# Altium PCB XEM7310_Berakout.PcbDoc (part 2 of 3)
Units mil, origin at the board's own origin, x right, y up, seen from the top; angles counter-clockwise.
Board outline 5980 x 6510 mil, 4 copper layers (Top, Ground Plane, Power Plane, Bottom), stack 61.496 mil thick; 68 components, 204 nets, 832 pads, 382 vias.
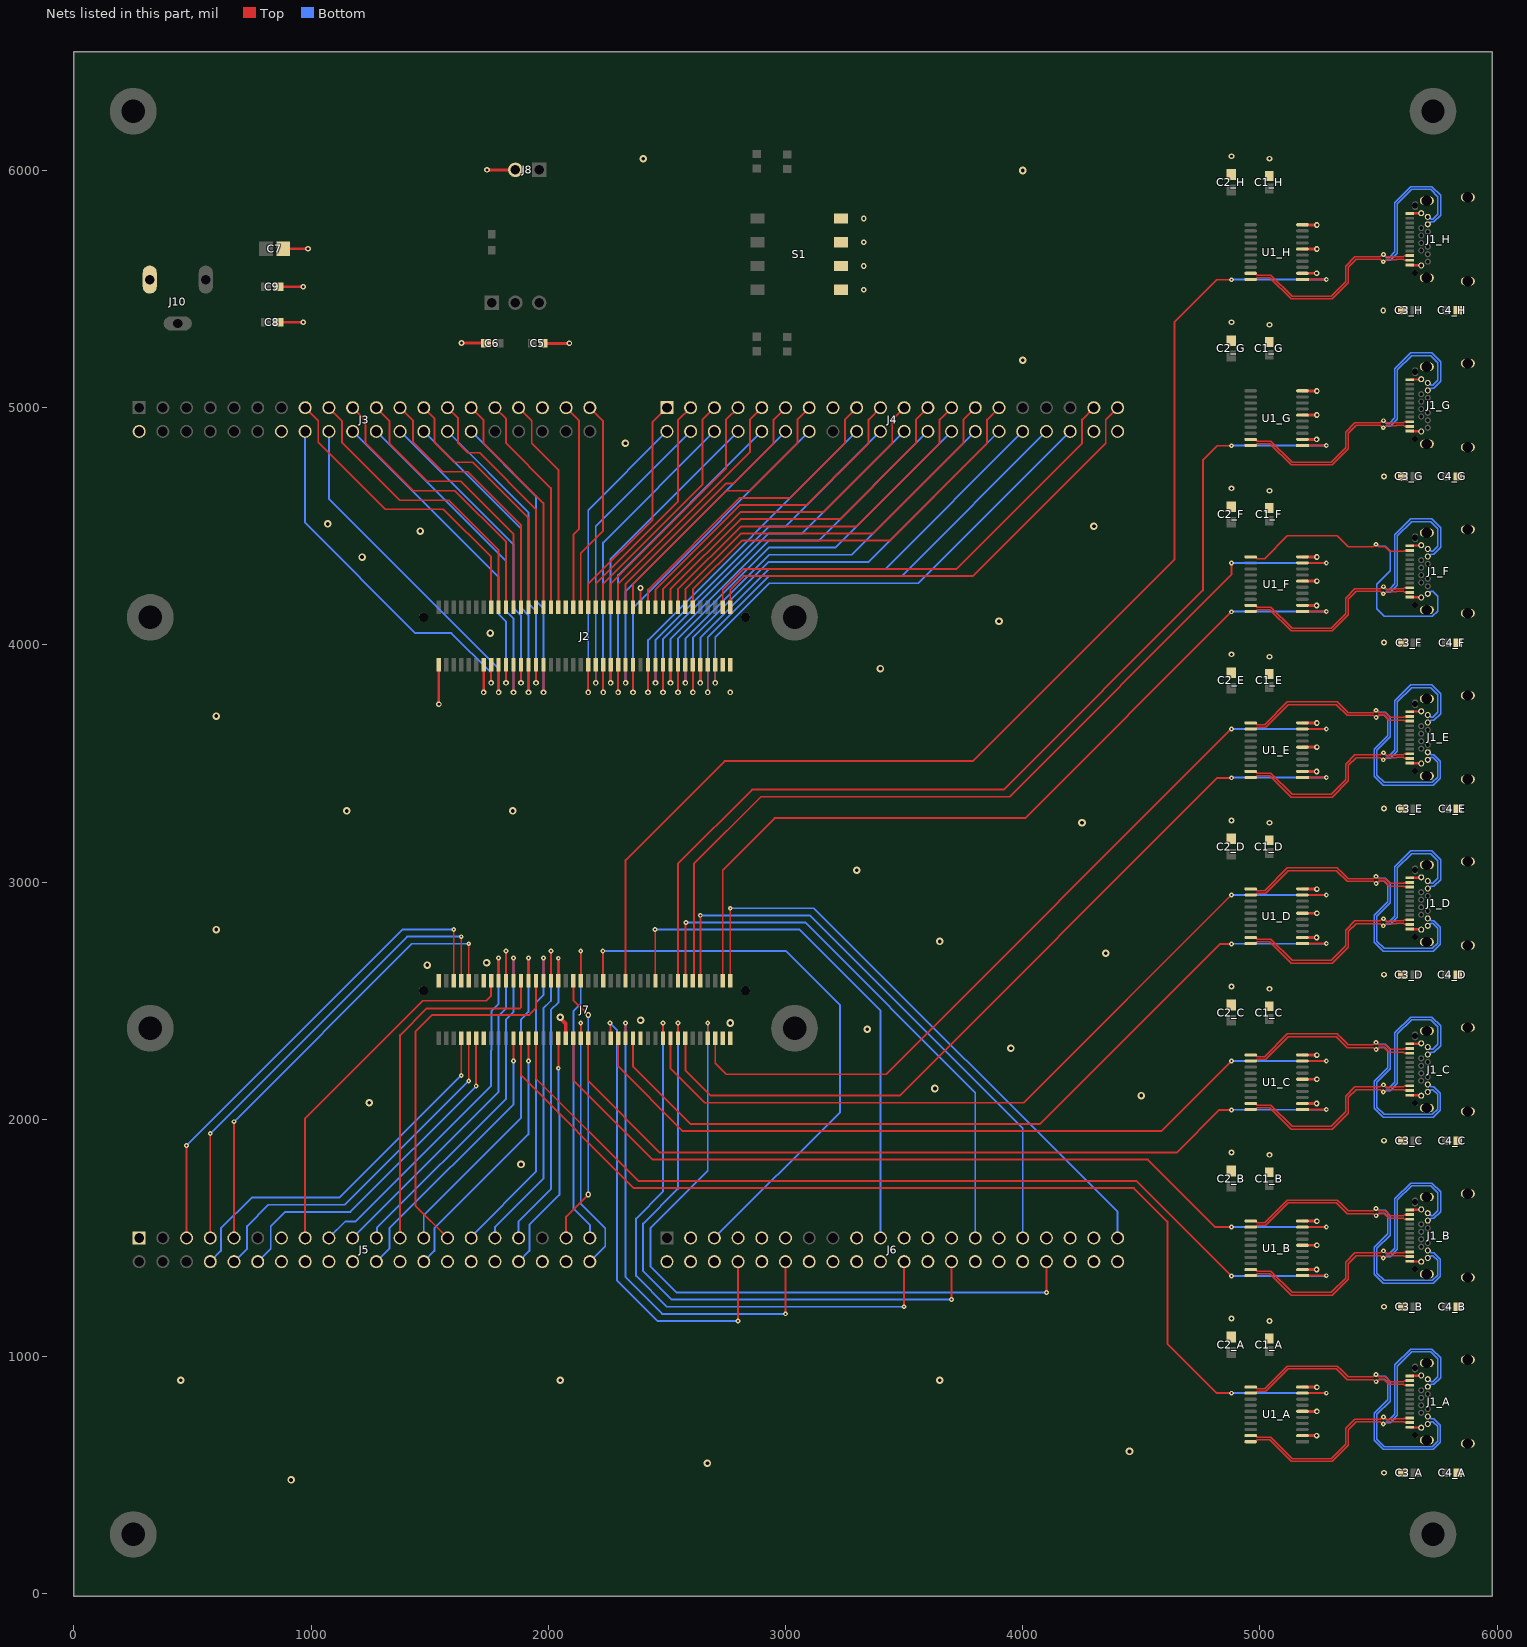
[diagram p4: the nets of this part, all layers, seen from the top]

## Via types
v1: diameter 20, hole 8, Top to Bottom, 190 vias
v2: diameter 24, hole 12, Top to Bottom, 154 vias
v3: diameter 32, hole 16, Top to Bottom, 38 vias

## Nets (pads, with @x,y where several pads share a name; then routed paths per layer and width w, separated by ;. In a path a pad name is that pad's centre, name@x,y a point inside that pad or via, vN(x,y) a via of type N, cw(c..) or ccw(c..) an arc to the next point about the centre after c; other vN are vias at no path point) (continued)
C\S\_A_N: J1_A.A3 J1_A.B3 U1_A.19 | length 1489
  Top w6.3: U1_A.19@4960.73,666.55 4982.63,666.55 4989.78,659.4 5046.58,659.4 5135.98,570 5300.05,570 5361.07,631.02 5361.07,696.82 5400.82,736.57 5508.31,736.57 5517.25,745.5 5522.75,745.5 5532.71,735.55 5570.36,735.55 5571.72,736.91 5605.67,736.91 5609.24,740.47 5631.77,740.47 J1_A.A3@5632.4,741.1
  Bottom w6.3: v1(5520.82,745.5) 5522.84,745.5 5535.59,732.75 5544.64,732.75 5568.7,756.81 5568.7,964.68 5635.32,1031.3 5724.68,1031.3 5761.3,994.68 5761.3,910.74 5733.65,883.09 5722.89,883.09 5712.8,872.99 J1_A.B3@5707.6,872.99
C\S\_A_P: J1_A.A2 J1_A.B2 U1_A.20 | length 1449.3
  Top w6.3: U1_A.20@4960.73,640.96 4982.63,640.96 4989.78,648.1 5041.9,648.1 5131.3,558.7 5304.73,558.7 5372.37,626.34 5372.37,692.14 5405.5,725.26 5508.31,725.26 5518.07,715.51 5523.57,715.51 5532.31,724.24 5575.04,724.24 5576.41,725.61 5605.67,725.61 5609.24,722.05 5631.77,722.05 J1_A.A2@5632.4,721.42
  Bottom w6.3: v1(5520,715.51) 5523.71,715.51 5529.65,721.45 5549.32,721.45 5580,752.13 5580,960 5640,1020 5720,1020 5750,990 5750,915.42 5728.97,894.39 5722.89,894.39 5712.8,904.49 J1_A.B2@5707.6,904.49
C\S\_B: J7.28 U1_B.1 | length 3947.2
  Top w8: J7.28@1947.91,2341.02 1947.91,2172.09 2380,1740 4479.51,1740 v1(4880,1339.51) ; U1_B.1@5179.27,1340.96 v1(5280,1340.96)
  Bottom w8: v1(4880,1339.51) 4880.73,1340.23 5279.27,1340.23 v1(5280,1340.96)
C\S\_B_N: J1_B.A3 J1_B.B3 U1_B.19 | length 1489
  Top w6.3: U1_B.19@4960.73,1366.55 4982.63,1366.55 4989.78,1359.4 5046.58,1359.4 5135.98,1270 5300.05,1270 5361.07,1331.02 5361.07,1396.82 5400.82,1436.57 5508.31,1436.57 5517.25,1445.5 5522.75,1445.5 5532.71,1435.55 5570.36,1435.55 5571.72,1436.91 5605.67,1436.91 5609.24,1440.47 5631.77,1440.47 J1_B.A3@5632.4,1441.1
  Bottom w6.3: v1(5520.82,1445.5) 5522.84,1445.5 5535.59,1432.75 5544.64,1432.75 5568.7,1456.81 5568.7,1664.68 5635.32,1731.3 5724.68,1731.3 5761.3,1694.68 5761.3,1610.74 5733.65,1583.09 5722.89,1583.09 5712.8,1572.99 J1_B.B3@5707.6,1572.99
C\S\_B_P: J1_B.A2 J1_B.B2 U1_B.20 | length 1449.3
  Top w6.3: U1_B.20@4960.73,1340.96 4982.63,1340.96 4989.78,1348.1 5041.9,1348.1 5131.3,1258.7 5304.73,1258.7 5372.37,1326.34 5372.37,1392.14 5405.5,1425.26 5508.31,1425.26 5518.07,1415.51 5523.57,1415.51 5532.31,1424.24 5575.04,1424.24 5576.41,1425.61 5605.67,1425.61 5609.24,1422.05 5631.77,1422.05 J1_B.A2@5632.4,1421.42
  Bottom w6.3: v1(5520,1415.51) 5523.71,1415.51 5529.65,1421.45 5549.32,1421.45 5580,1452.13 5580,1660 5640,1720 5720,1720 5750,1690 5750,1615.42 5728.97,1594.39 5722.89,1594.39 5712.8,1604.49 J1_B.B2@5707.6,1604.49
C\S\_C: J7.42 U1_C.1 | length 3591.6
  Top w8: J7.42@2168.39,2341.02 2168.39,2161.61 2470,1860 4649.54,1860 4829.05,2039.51 v1(4880,2039.51) ; U1_C.1@5179.27,2040.96 v1(5280,2040.96)
  Bottom w8: v1(4880,2039.51) 4880.73,2040.23 5279.27,2040.23 v1(5280,2040.96)
C\S\_C_N: J1_C.A3 J1_C.B3 U1_C.19 | length 1489
  Top w6.3: U1_C.19@4960.73,2066.55 4982.63,2066.55 4989.78,2059.4 5046.58,2059.4 5135.98,1970 5300.05,1970 5361.07,2031.02 5361.07,2096.82 5400.82,2136.57 5508.31,2136.57 5517.25,2145.5 5522.75,2145.5 5532.71,2135.55 5570.36,2135.55 5571.72,2136.91 5605.67,2136.91 5609.24,2140.47 5631.77,2140.47 J1_C.A3@5632.4,2141.1
  Bottom w6.3: v1(5520.82,2145.5) 5522.84,2145.5 5535.59,2132.75 5544.64,2132.75 5568.7,2156.81 5568.7,2364.68 5635.32,2431.3 5724.68,2431.3 5761.3,2394.68 5761.3,2310.74 5733.65,2283.09 5722.89,2283.09 5712.8,2272.99 J1_C.B3@5707.6,2272.99
C\S\_C_P: J1_C.A2 J1_C.B2 U1_C.20 | length 1449.3
  Top w6.3: U1_C.20@4960.73,2040.96 4982.63,2040.96 4989.78,2048.1 5041.9,2048.1 5131.3,1958.7 5304.73,1958.7 5372.37,2026.34 5372.37,2092.14 5405.5,2125.26 5508.31,2125.26 5518.07,2115.51 5523.57,2115.51 5532.31,2124.24 5575.04,2124.24 5576.41,2125.61 5605.67,2125.61 5609.24,2122.05 5631.77,2122.05 J1_C.A2@5632.4,2121.42
  Bottom w6.3: v1(5520,2115.51) 5523.71,2115.51 5529.65,2121.45 5549.32,2121.45 5580,2152.13 5580,2360 5640,2420 5720,2420 5750,2390 5750,2315.42 5728.97,2294.39 5722.89,2294.39 5712.8,2304.49 J1_C.B2@5707.6,2304.49
C\S\_D: J7.54 U1_D.1 | length 3557.5
  Top w8: J7.54@2357.36,2341.02 2357.36,2222.64 2600,1980 4072.6,1980 4832.1,2739.51 v1(4880,2739.51) ; U1_D.1@5179.27,2740.96 v1(5280,2740.96)
  Bottom w8: v1(4880,2739.51) 4880.73,2740.23 5279.27,2740.23 v1(5280,2740.96)
C\S\_D_N: J1_D.A3 J1_D.B3 U1_D.19 | length 1489
  Top w6.3: U1_D.19@4960.73,2766.55 4982.63,2766.55 4989.78,2759.4 5046.58,2759.4 5135.98,2670 5300.05,2670 5361.07,2731.02 5361.07,2796.82 5400.82,2836.57 5508.31,2836.57 5517.25,2845.5 5522.75,2845.5 5532.71,2835.55 5570.36,2835.55 5571.72,2836.91 5605.67,2836.91 5609.24,2840.47 5631.77,2840.47 J1_D.A3@5632.4,2841.1
  Bottom w6.3: v1(5520.82,2845.5) 5522.84,2845.5 5535.59,2832.75 5544.64,2832.75 5568.7,2856.81 5568.7,3064.68 5635.32,3131.3 5724.68,3131.3 5761.3,3094.68 5761.3,3010.74 5733.65,2983.09 5722.89,2983.09 5712.8,2972.99 J1_D.B3@5707.6,2972.99
C\S\_D_P: J1_D.A2 J1_D.B2 U1_D.20 | length 1449.3
  Top w6.3: U1_D.20@4960.73,2740.96 4982.63,2740.96 4989.78,2748.1 5041.9,2748.1 5131.3,2658.7 5304.73,2658.7 5372.37,2726.34 5372.37,2792.14 5405.5,2825.26 5508.31,2825.26 5518.07,2815.51 5523.57,2815.51 5532.31,2824.24 5575.04,2824.24 5576.41,2825.61 5605.67,2825.61 5609.24,2822.05 5631.77,2822.05 J1_D.A2@5632.4,2821.42
  Bottom w6.3: v1(5520,2815.51) 5523.71,2815.51 5529.65,2821.45 5549.32,2821.45 5580,2852.13 5580,3060 5640,3120 5720,3120 5750,3090 5750,3015.42 5728.97,2994.39 5722.89,2994.39 5712.8,3004.49 J1_D.B2@5707.6,3004.49
C\S\_E: J7.68 U1_E.1 | length 3536.5
  Top w8: J7.68@2577.83,2341.02 2577.83,2207.32 2685.16,2100 3480.61,2100 4820.12,3439.51 v1(4880,3439.51) ; U1_E.1@5179.27,3440.96 v1(5280,3440.96)
  Bottom w8: v1(4880,3439.51) 4880.73,3440.23 5279.27,3440.23 v1(5280,3440.96)
C\S\_E_N: J1_E.A3 J1_E.B3 U1_E.19 | length 1489
  Top w6.3: U1_E.19@4960.73,3466.55 4982.63,3466.55 4989.78,3459.4 5046.58,3459.4 5135.98,3370 5300.05,3370 5361.07,3431.02 5361.07,3496.82 5400.82,3536.57 5508.31,3536.57 5517.25,3545.5 5522.75,3545.5 5532.71,3535.55 5570.36,3535.55 5571.72,3536.91 5605.67,3536.91 5609.24,3540.47 5631.77,3540.47 J1_E.A3@5632.4,3541.1
  Bottom w6.3: v1(5520.82,3545.5) 5522.84,3545.5 5535.59,3532.75 5544.64,3532.75 5568.7,3556.81 5568.7,3764.68 5635.32,3831.3 5724.68,3831.3 5761.3,3794.68 5761.3,3710.74 5733.65,3683.09 5722.89,3683.09 5712.8,3672.99 J1_E.B3@5707.6,3672.99
C\S\_E_P: J1_E.A2 J1_E.B2 U1_E.20 | length 1449.3
  Top w6.3: U1_E.20@4960.73,3440.96 4982.63,3440.96 4989.78,3448.1 5041.9,3448.1 5131.3,3358.7 5304.73,3358.7 5372.37,3426.34 5372.37,3492.14 5405.5,3525.26 5508.31,3525.26 5518.07,3515.51 5523.57,3515.51 5532.31,3524.24 5575.04,3524.24 5576.41,3525.61 5605.67,3525.61 5609.24,3522.05 5631.77,3522.05 J1_E.A2@5632.4,3521.42
  Bottom w6.3: v1(5520,3515.51) 5523.71,3515.51 5529.65,3521.45 5549.32,3521.45 5580,3552.13 5580,3760 5640,3820 5720,3820 5750,3790 5750,3715.42 5728.97,3694.39 5722.89,3694.39 5712.8,3704.49 J1_E.B2@5707.6,3704.49
C\S\_F: J7.77 U1_F.1 | length 3563.9
  Top w8: J7.77@2735.32,2584.02 2735.32,3050.98 2954.33,3270 4010.49,3270 v1(4880,4139.51) ; U1_F.1@5179.27,4140.96 v1(5280,4140.96)
  Bottom w8: v1(4880,4139.51) 4880.73,4140.23 5279.27,4140.23 v1(5280,4140.96)
C\S\_F_N: J1_F.A3 J1_F.B3 U1_F.19 | length 1489
  Top w6.3: U1_F.19@4960.73,4166.55 4982.63,4166.55 4989.78,4159.4 5046.58,4159.4 5135.98,4070 5300.05,4070 5361.07,4131.02 5361.07,4196.82 5400.82,4236.57 5508.31,4236.57 5517.25,4245.5 5522.75,4245.5 5532.71,4235.55 5570.36,4235.55 5571.72,4236.91 5605.67,4236.91 5609.24,4240.47 5631.77,4240.47 J1_F.A3@5632.4,4241.1
  Bottom w6.3: v1(5520.82,4245.5) 5522.84,4245.5 5535.59,4232.75 5544.64,4232.75 5568.7,4256.81 5568.7,4464.68 5635.32,4531.3 5724.68,4531.3 5761.3,4494.68 5761.3,4410.74 5733.65,4383.09 5722.89,4383.09 5712.8,4372.99 J1_F.B3@5707.6,4372.99
C\S\_F_P: J1_F.A2 J1_F.B2 U1_F.20 | length 1449.3
  Top w6.3: U1_F.20@4960.73,4140.96 4982.63,4140.96 4989.78,4148.1 5041.9,4148.1 5131.3,4058.7 5304.73,4058.7 5372.37,4126.34 5372.37,4192.14 5405.5,4225.26 5508.31,4225.26 5518.07,4215.51 5523.57,4215.51 5532.31,4224.24 5575.04,4224.24 5576.41,4225.61 5605.67,4225.61 5609.24,4222.05 5631.77,4222.05 J1_F.A2@5632.4,4221.42
  Bottom w6.3: v1(5520,4215.51) 5523.71,4215.51 5529.65,4221.45 5549.32,4221.45 5580,4252.13 5580,4460 5640,4520 5720,4520 5750,4490 5750,4415.42 5728.97,4394.39 5722.89,4394.39 5712.8,4404.49 J1_F.B2@5707.6,4404.49
C\S\_G: J7.65 U1_G.1 | length 4379.3
  Top w8: J7.65@2546.34,2584.02 2546.34,3076.8 2859.54,3390 3920,3390 4760,4230 4760,4778.7 4820.81,4839.51 v1(4880,4839.51) ; U1_G.1@5179.27,4840.96 v1(5280,4840.96)
  Bottom w8: v1(4880,4839.51) 4880.73,4840.23 5279.27,4840.23 v1(5280,4840.96)
C\S\_G_N: J1_G.A3 J1_G.B3 U1_G.19 | length 1489
  Top w6.3: U1_G.19@4960.73,4866.55 4982.63,4866.55 4989.78,4859.4 5046.58,4859.4 5135.98,4770 5300.05,4770 5361.07,4831.02 5361.07,4896.82 5400.82,4936.57 5508.31,4936.57 5517.25,4945.5 5522.75,4945.5 5532.71,4935.55 5570.36,4935.55 5571.72,4936.91 5605.67,4936.91 5609.24,4940.47 5631.77,4940.47 J1_G.A3@5632.4,4941.1
  Bottom w6.3: v1(5520.82,4945.5) 5522.84,4945.5 5535.59,4932.75 5544.64,4932.75 5568.7,4956.81 5568.7,5164.68 5635.32,5231.3 5724.68,5231.3 5761.3,5194.68 5761.3,5110.74 5733.65,5083.09 5722.89,5083.09 5712.8,5072.99 J1_G.B3@5707.6,5072.99
C\S\_G_P: J1_G.A2 J1_G.B2 U1_G.20 | length 1449.3
  Top w6.3: U1_G.20@4960.73,4840.96 4982.63,4840.96 4989.78,4848.1 5041.9,4848.1 5131.3,4758.7 5304.73,4758.7 5372.37,4826.34 5372.37,4892.14 5405.5,4925.26 5508.31,4925.26 5518.07,4915.51 5523.57,4915.51 5532.31,4924.24 5575.04,4924.24 5576.41,4925.61 5605.67,4925.61 5609.24,4922.05 5631.77,4922.05 J1_G.A2@5632.4,4921.42
  Bottom w6.3: v1(5520,4915.51) 5523.71,4915.51 5529.65,4921.45 5549.32,4921.45 5580,4952.13 5580,5160 5640,5220 5720,5220 5750,5190 5750,5115.42 5728.97,5094.39 5722.89,5094.39 5712.8,5104.49 J1_G.B2@5707.6,5104.49
C\S\_H: J7.51 U1_H.1 | length 5164.1
  Top w8: J7.51@2325.87,2584.02 2325.87,3092.76 2743.11,3510 3789.58,3510 4640,4360.42 4640,5361.54 4817.97,5539.51 v1(4880,5539.51) ; U1_H.1@5179.27,5540.96 v1(5280,5540.96)
  Bottom w8: v1(4880,5539.51) 4880.73,5540.23 5279.27,5540.23 v1(5280,5540.96)
C\S\_H_N: J1_H.A3 J1_H.B3 U1_H.19 | length 1489
  Top w6.3: U1_H.19@4960.73,5566.55 4982.63,5566.55 4989.78,5559.4 5046.58,5559.4 5135.98,5470 5300.05,5470 5361.07,5531.02 5361.07,5596.82 5400.82,5636.57 5508.31,5636.57 5517.25,5645.5 5522.75,5645.5 5532.71,5635.55 5570.36,5635.55 5571.72,5636.91 5605.67,5636.91 5609.24,5640.47 5631.77,5640.47 J1_H.A3@5632.4,5641.1
  Bottom w6.3: v1(5520.82,5645.5) 5522.84,5645.5 5535.59,5632.75 5544.64,5632.75 5568.7,5656.81 5568.7,5864.68 5635.32,5931.3 5724.68,5931.3 5761.3,5894.68 5761.3,5810.74 5733.65,5783.09 5722.89,5783.09 5712.8,5772.99 J1_H.B3@5707.6,5772.99
C\S\_H_P: J1_H.A2 J1_H.B2 U1_H.20 | length 1449.3
  Top w6.3: U1_H.20@4960.73,5540.96 4982.63,5540.96 4989.78,5548.1 5041.9,5548.1 5131.3,5458.7 5304.73,5458.7 5372.37,5526.34 5372.37,5592.14 5405.5,5625.26 5508.31,5625.26 5518.07,5615.51 5523.57,5615.51 5532.31,5624.24 5575.04,5624.24 5576.41,5625.61 5605.67,5625.61 5609.24,5622.05 5631.77,5622.05 J1_H.A2@5632.4,5621.42
  Bottom w6.3: v1(5520,5615.51) 5523.71,5615.51 5529.65,5621.45 5549.32,5621.45 5580,5652.13 5580,5860 5640,5920 5720,5920 5750,5890 5750,5815.42 5728.97,5794.39 5722.89,5794.39 5712.8,5804.49 J1_H.B2@5707.6,5804.49
FPGA_TCK: J5.05 J7.05 | length 2109.4
  Top w8: J5.05@475,1500 v1(475,1890) ; J7.05@1601.46,2584.02 v1(1601.46,2800)
  Bottom w8: v1(475,1890) 1385,2800 v1(1601.46,2800)
FPGA_TDI: J5.09 J7.09 | length 1946.1
  Top w8: J5.09@675,1500 v1(675,1990) ; J7.09@1664.45,2584.02 v1(1664.45,2740)
  Bottom w8: v1(675,1990) 1425,2740 v1(1664.45,2740)
FPGA_TDO: J5.08 J7.08 | length 1594.7
  Top w8: v1(1632.95,2185.08) J7.08@1632.95,2341.02
  Bottom w8: J5.08@575,1400 620,1445 620,1540 750,1670 1117.87,1670 v1(1632.95,2185.08)
FPGA_TMS: J5.07 J7.07 | length 2027.7
  Top w8: J5.07@575,1500 v1(575,1940) ; J7.07@1632.95,2584.02 v1(1632.95,2770)
  Bottom w8: v1(575,1940) 1405,2770 v1(1632.95,2770)
GND: C1_A.2 C1_B.2 C1_C.2 C1_D.2 C1_E.2 C1_F.2 C1_G.2 C1_H.2 C2_A.1 C2_B.1 C2_C.1 C2_D.1 C2_E.1 C2_F.1 C2_G.1 C2_H.1 C3_A.2 C3_B.2 C3_C.2 C3_D.2 C3_E.2 C3_F.2 C3_G.2 C3_H.2 C4_A.2 C4_B.2 C4_C.2 C4_D.2 C4_E.2 C4_F.2 C4_G.2 C4_H.2 C5.2 C6.2 C7.2 C8.2 C9.2 J1_A.1 J1_A.2 J1_A.3 J1_A.4 J1_A.A1 J1_A.A12 J1_A.B1 J1_A.B12 J1_B.1 J1_B.2 J1_B.3 J1_B.4 J1_B.A1 J1_B.A12 J1_B.B1 J1_B.B12 J1_C.1 J1_C.2 J1_C.3 J1_C.4 J1_C.A1 J1_C.A12 J1_C.B1 J1_C.B12 J1_D.1 J1_D.2 J1_D.3 J1_D.4 J1_D.A1 J1_D.A12 J1_D.B1 J1_D.B12 J1_E.1 J1_E.2 J1_E.3 J1_E.4 J1_E.A1 J1_E.A12 J1_E.B1 J1_E.B12 J1_F.1 J1_F.2 J1_F.3 J1_F.4 J1_F.A1 J1_F.A12 J1_F.B1 J1_F.B12 J1_G.1 J1_G.2 J1_G.3 J1_G.4 J1_G.A1 J1_G.A12 J1_G.B1 J1_G.B12 J1_H.1 J1_H.2 J1_H.3 J1_H.4 J1_H.A1 J1_H.A12 J1_H.B1 J1_H.B12 J2.02 J2.14 J2.35 J2.55 J2.78 J2.80 J3.02 J3.14 J3.35 J4.15 J4.38 J4.40 J5.01 J5.13 J5.14 J5.16 J5.18 J5.20 J5.24 J5.28 J5.30 J5.32 J5.36 J5.38 J6.02 J6.03 J6.04 J6.06 J6.07 J6.09 J6.10 J6.11 J6.14 J6.16 J6.17 J6.18 J6.20 J6.21 J6.23 J6.24 J6.25 J6.28 J6.29 J6.30 J6.32 J6.33 J6.35 J6.36 J6.37 J6.38 J6.40 J7.01 J7.13 J7.14 J7.36 J7.56 J7.78 J7.80 J8.2 J10.2 S1.1B S1.2B S1.3B S1.4B U1_A.2 U1_A.6 U1_A.10 U1_B.2 U1_B.6 U1_B.10 U1_C.2 U1_C.6 U1_C.10 U1_D.2 U1_D.6 U1_D.10 U1_E.2 U1_E.6 U1_E.10 U1_F.2 U1_F.6 U1_F.10 U1_G.2 U1_G.6 U1_G.10 U1_H.2 U1_H.6 U1_H.10 | length 3301.4
  Top w10: v2(1538.46,3750) J2.02@1538.46,3915.83 ; v2(1727.44,3800) J2.14@1727.44,3915.83 ; J2.55@2388.86,4158.82 v2(2388.86,4240) ; J1_A.A1@5632.4,701.73 5633.31,700.83 5678.98,700.83 J1_A.B12@5680.04,699.76 ; J1_A.A12@5632.4,918.27 5633.31,919.17 5678.98,919.17 J1_A.B1@5680.04,920.24 ; J1_B.A1@5633.31,1400.83 J1_B.B12@5678.98,1400.83 ; J1_B.A12@5633.31,1619.17 J1_B.B1@5678.98,1619.17 ; J1_C.A1@5633.31,2100.83 J1_C.B12@5678.98,2100.83 ; J1_C.A12@5633.31,2319.17 J1_C.B1@5678.98,2319.17 ; J1_D.A1@5633.31,2800.83 J1_D.B12@5678.98,2800.83 ; J1_D.A12@5633.31,3019.17 J1_D.B1@5678.98,3019.17 ; J1_E.A1@5633.31,3500.83 J1_E.B12@5678.98,3500.83 ; J1_E.A12@5633.31,3719.17 J1_E.B1@5678.98,3719.17 ; J1_F.A1@5633.31,4200.83 J1_F.B12@5678.98,4200.83 ; J1_F.A12@5633.31,4419.17 J1_F.B1@5678.98,4419.17 ; J1_G.A1@5633.31,4900.83 J1_G.B12@5678.98,4900.83 ; J1_G.A12@5633.31,5119.17 J1_G.B1@5678.98,5119.17 ; J1_H.A1@5633.31,5600.83 J1_H.B12@5678.98,5600.83 ; J1_H.A12@5633.31,5819.17 J1_H.B1@5678.98,5819.17
  Top w12: C8.2@863.31,5360 v2(966.65,5360) ; C9.2@863.31,5510 v2(966.65,5510) ; C7.2@882.9,5670 v2(986.65,5670) ; v2(1634.16,5272.51) C6.2@1737.5,5272.51 ; v2(1741.49,6002.67) J8.2@1861.49,6002.67 ; C5.2@1979.46,5270.81 1979.85,5271.2 2088.43,5271.2 v2(2088.82,5271.59) ; U1_A.2@5178.53,666.55 v2(5239.27,666.55) ; U1_B.2@5178.53,1366.55 v2(5239.27,1366.55) ; U1_C.2@5178.53,2066.55 v2(5239.27,2066.55) ; U1_D.2@5178.53,2766.55 v2(5239.27,2766.55) ; U1_E.2@5178.53,3466.55 v2(5239.27,3466.55) ; U1_F.2@5178.53,4166.55 v2(5239.27,4166.55) ; U1_G.2@5178.53,4866.55 v2(5239.27,4866.55) ; U1_H.2@5178.53,5566.55 v2(5239.27,5566.55) ; U1_A.6@5179.27,768.91 v2(5240,768.91) ; U1_A.10@5179.27,871.27 5179.54,871 5239.56,871 v2(5240,870.56) ; U1_B.6@5179.27,1468.91 v2(5240,1468.91) ; U1_B.10@5179.27,1571.27 5179.54,1571 5239.56,1571 v2(5240,1570.56) ; U1_C.6@5179.27,2168.91 v2(5240,2168.91) ; U1_C.10@5179.27,2271.27 5179.54,2271 5239.56,2271 v2(5240,2270.56) ; U1_D.6@5179.27,2868.91 v2(5240,2868.91) ; U1_D.10@5179.27,2971.27 5179.54,2971 5239.56,2971 v2(5240,2970.56) ; U1_E.6@5179.27,3568.91 v2(5240,3568.91) ; U1_E.10@5179.27,3671.27 5179.54,3671 5239.56,3671 v2(5240,3670.56) ; U1_F.6@5179.27,4268.91 v2(5240,4268.91) ; U1_F.10@5179.27,4371.27 5179.54,4371 5239.56,4371 v2(5240,4370.56) ; U1_G.6@5179.27,4968.91 v2(5240,4968.91) ; U1_G.10@5179.27,5071.27 5179.54,5071 5239.56,5071 v2(5240,5070.56) ; U1_H.6@5179.27,5668.91 v2(5240,5668.91) ; U1_H.10@5179.27,5771.27 5179.54,5771 5239.56,5771 v2(5240,5770.56)
  Top w16: v3(2050,2430) 2050,2425.67 2073.9,2401.77 J7.36@2073.9,2341.02
  other v2: 5523.17,510 5040,1150 4880,1160 5523.17,1210 5040,1850 4880,1860 5523.17,1910 5040,2550 4880,2560 5523.17,2610 5040,3250 4880,3260 5523.17,3310 2766.81,3800 5040,3950 4880,3960 5523.17,4010 5040,4650 4880,4660 5523.17,4710 5040,5350 4880,5360 5519.86,5410 3330,5497.6 3330,5597.6 3330,5697.6 3330,5797.6 5040,6050 4880,6060
  other v3: 915.68,480 2670.58,550 4450,600 450,900 2050,900 3650,900 1885,1810 1245,2070 4500,2100 3630,2130 3950,2300 3345,2380 2766.81,2406.08 2388.86,2418 1490.05,2650 1740,2660 4350,2700 3650,2750 600,2800 3300,3050 4250,3250 1150,3300 1850,3300 600,3700 3400,3900 1755,4050 3900,4100 1215,4370 1460,4480 4300,4500 1070,4510 2325,4850 4000,5200 4000,6000 2400,6050
MC1_15: J2.15 J3.15 | length 1309.8
  Top w8: J3.15@975,5000 1030,4945 1030,4854.45 1312.36,4572.09 1557.99,4572.09 1758.94,4371.14 J2.15@1758.94,4158.82
MC1_16: J2.16 J3.16 | length 1549.3
  Top w8: v2(1758.94,3840) J2.16@1758.94,3915.83
  Bottom w8: J3.16@975,4900 975,4515 1440,4050 1591.46,4050 1758.94,3882.52 v2(1758.94,3840)
MC1_17: J2.17 J3.17 | length 1257.9
  Top w8: J3.17@1075,5000 1130,4945 1130,4854.45 1374.45,4610 1580,4610 1790.43,4399.57 J2.17@1790.43,4158.82
MC1_18: J2.18 J3.18 | length 1512.2
  Top w8: v2(1790.43,3800) J2.18@1790.43,3915.83
  Bottom w8: J3.18@1075,4900 1075,4615.32 1790.43,3899.88 v2(1790.43,3800)
MC1_19: J2.19 J3.19 | length 1212.3
  Top w8: J3.19@1175,5000 1230,4945 1230,4850 1430,4650 1606.06,4650 1821.93,4434.13 J2.19@1821.93,4158.82
MC1_20: J2.20 J3.20 | length 1403.8
  Top w8: v2(1821.93,3840) J2.20@1821.93,3915.83
  Bottom w8: J3.20@1175,4900 1790.43,4284.57 1790.43,4129.57 1821.93,4098.07 v2(1821.93,3840)
MC1_21: J2.21 J3.21 | length 1162.8
  Top w8: J3.21@1275,5000 1330,4945 1330,4850 1490,4690 1630,4690 1853.43,4466.57 J2.21@1853.43,4158.82
MC1_22: J2.22 J3.22 | length 1455.4
  Top w8: v2(1853.43,3800) J2.22@1853.43,3915.83
  Bottom w8: J3.22@1275,4900 1821.93,4353.07 1821.93,4141.5 1853.43,4110 v2(1853.43,3800)
MC1_23: J2.23 J3.23 | length 1114.2
  Top w8: J3.23@1375,5000 1430,4945 1430,4854.45 1554.45,4730 1660,4730 1884.92,4505.08 J2.23@1884.92,4158.82
MC1_24: J2.24 J3.24 | length 1347
  Top w8: v2(1884.92,3840) J2.24@1884.92,3915.83
  Bottom w8: J3.24@1375,4900 1853.43,4421.57 1853.43,4154.61 1884.92,4123.11 v2(1884.92,3840)
MC1_25: J2.25 J3.25 | length 1069.4
  Top w8: J3.25@1475,5000 1520,4955 1520,4854.45 1604.45,4770 1681.93,4770 1916.42,4535.51 J2.25@1916.42,4158.82
MC1_26: J2.26 J3.26 | length 1398.7
  Top w8: v2(1916.42,3800) J2.26@1916.42,3915.83
  Bottom w8: J3.26@1475,4900 1884.92,4490.08 1884.92,4157.36 1916.42,4125.87 v2(1916.42,3800)
MC1_27: J2.27 J3.27 | length 1024.3
  Top w8: J3.27@1575,5000 1620,4955 1620,4851.02 1661.02,4810 1710,4810 1947.91,4572.09 J2.27@1947.91,4158.82
MC1_28: J2.28 J3.28 | length 1290.3
  Top w8: v2(1947.91,3840) J2.28@1947.91,3915.83
  Bottom w8: J3.28@1575,4900 1916.42,4558.58 1916.42,4175.2 1947.91,4143.7 v2(1947.91,3840)
MC1_29: J2.29 J3.29 | length 967.3
  Top w8: J3.29@1675,5000 1727.44,4947.56 1727.44,4850 1979.41,4598.03 J2.29@1979.41,4158.82
MC1_30: J2.30 J3.30 | length 1341.9
  Top w8: v2(1979.41,3800) J2.30@1979.41,3915.83
  Bottom w8: J3.30@1675,4900 1947.91,4627.09 1947.91,4186.1 1979.41,4154.61 v2(1979.41,3800)
MC1_31: J2.31 J3.31 | length 938.9
  Top w8: J3.31@1775,5000 1821.93,4953.07 1821.93,4850 2010.91,4661.02 J2.31@2010.91,4158.82
MC1_33: J2.33 J3.33 | length 910.5
  Top w8: J3.33@1875,5000 1930,4945 1930,4850 2042.4,4737.6 J2.33@2042.4,4158.82
MC1_37: J2.37 J3.37 | length 874.2
  Top w8: J3.37@2075,5000 2130,4945 2130,4490 2105.39,4465.39 J2.37@2105.39,4158.82
MC1_39: J2.39 J3.39 | length 902.5
  Top w8: J2.39@2136.89,4158.82 2136.89,4386.89 2230,4480 2230,4945 J3.39@2175,5000
MC1_41: J2.41 J4.01 | length 978.5
  Top w8: J2.41@2168.39,4158.82 2168.39,4257.01 2440,4528.62 2440,4940 J4.01@2500,5000
MC1_42: J2.42 J4.02 | length 1353.2
  Top w8: v2(2168.39,3800) J2.42@2168.39,3915.83
  Bottom w8: v2(2168.39,3800) 2168.39,4568.39 J4.02@2500,4900
MC1_43: J2.43 J4.03 | length 1006.9
  Top w8: J2.43@2199.88,4158.82 2199.88,4257.01 2546.34,4603.46 2546.34,4946.34 J4.03@2600,5000
MC1_44: J2.44 J4.04 | length 1301.6
  Top w8: v2(2199.88,3840) J2.44@2199.88,3915.83
  Bottom w8: v2(2199.88,3840) 2199.88,4499.88 J4.04@2600,4900
MC1_45: J2.45 J4.05 | length 1035.3
  Top w8: J2.45@2231.38,4158.82 2231.38,4257.01 2650,4675.63 2650,4950 J4.05@2700,5000
MC1_46: J2.46 J4.06 | length 1409.9
  Top w8: v2(2231.38,3800) J2.46@2231.38,3915.83
  Bottom w8: v2(2231.38,3800) 2231.38,4431.38 J4.06@2700,4900
MC1_47: J2.47 J4.07 | length 1063.7
  Top w8: J2.47@2262.87,4158.82 2262.87,4257.36 2748.86,4743.35 2748.86,4948.86 J4.07@2800,5000
MC1_48: J2.48 J4.08 | length 1358.3
  Top w8: v2(2262.87,3840) J2.48@2262.87,3915.83
  Bottom w8: v2(2262.87,3840) 2262.87,4362.87 J4.08@2800,4900
MC1_49: J2.49 J4.09 | length 1092
  Top w8: J2.49@2294.37,4158.82 2294.37,4257.01 2850,4812.64 2850,4950 J4.09@2900,5000
MC1_50: J2.50 J4.10 | length 1466.7
  Top w8: v2(2294.37,3800) J2.50@2294.37,3915.83
  Bottom w8: v2(2294.37,3800) 2294.37,4294.37 J4.10@2900,4900
MC1_51: J2.51 J4.11 | length 1138.7
  Top w8: J2.51@2325.87,4158.82 2325.87,4257.01 2748.86,4680 2780,4680 2950,4850 2950,4950 J4.11@3000,5000
MC1_52: J2.52 J4.12 | length 1415.1
  Top w8: v2(2325.87,3840) J2.52@2325.87,3915.83
  Bottom w8: v2(2325.87,3840) 2325.87,4225.87 J4.12@3000,4900
MC1_53: J2.53 J4.13 | length 1207.4
  Top w8: J2.53@2357.36,4158.82 2357.36,4257.36 2750,4650 2850,4650 3050,4850 3050,4950 J4.13@3100,5000
MC1_54: J2.54 J4.14 | length 1523.4
  Top w8: v2(2357.36,3800) J2.54@2357.36,3915.83
  Bottom w8: v2(2357.36,3800) 2357.36,4157.36 J4.14@3100,4900
MC1_57: J2.57 J4.17 | length 1330.4
  Top w8: J2.57@2420.35,4158.82 2420.35,4233.51 2806.85,4620 3020,4620 3250,4850 3250,4950 J4.17@3300,5000
MC1_58: J2.58 J4.18 | length 1580.2
  Top w8: v2(2420.35,3800) J2.58@2420.35,3915.83
  Bottom w8: v2(2420.35,3800) 2420.35,4020.35 J4.18@3300,4900
MC1_59: J2.59 J4.19 | length 1398.9
  Top w8: J2.59@2451.85,4158.82 2451.85,4233.51 2808.34,4590 3090,4590 3350,4850 3350,4950 J4.19@3400,5000
MC1_60: J2.60 J4.20 | length 1568.7
  Top w8: v2(2451.85,3840) J2.60@2451.85,3915.83
  Bottom w8: v2(2451.85,3840) 2451.85,4020.29 2931.56,4500 3000,4500 J4.20@3400,4900
MC1_61: J2.61 J4.21 | length 1467.6
  Top w8: J2.61@2483.35,4158.82 2483.35,4233.82 2809.53,4560 3160,4560 3450,4850 3450,4950 J4.21@3500,5000
MC1_62: J2.62 J4.22 | length 1718.9
  Top w8: v2(2483.35,3800) J2.62@2483.35,3915.83
  Bottom w8: v2(2483.35,3800) 2483.35,4023.35 2930,4470 3070,4470 J4.22@3500,4900
MC1_63: J2.63 J4.23 | length 1536.1
  Top w8: J2.63@2514.84,4158.82 2514.84,4233.82 2811.02,4530 3230,4530 3550,4850 3550,4950 J4.23@3600,5000
MC1_64: J2.64 J4.24 | length 1708.3
  Top w8: v2(2514.84,3840) J2.64@2514.84,3915.83
  Bottom w8: v2(2514.84,3840) 2514.84,4024.84 2930,4440 3140,4440 J4.24@3600,4900
MC1_65: J2.65 J4.25 | length 1604.6
  Top w8: J2.65@2546.34,4158.82 2546.34,4233.82 2812.52,4500 3300,4500 3650,4850 3650,4950 J4.25@3700,5000
MC1_66: J2.66 J4.26 | length 1857.7
  Top w8: v2(2546.34,3800) J2.66@2546.34,3915.83
  Bottom w8: v2(2546.34,3800) 2546.34,4026.34 2930,4410 3210,4410 J4.26@3700,4900
MC1_67: J2.67 J4.27 | length 1673.1
  Top w8: J2.67@2577.83,4158.82 2577.83,4233.82 2814.02,4470 3370,4470 3750,4850 3750,4950 J4.27@3800,5000
MC1_68: J2.68 J4.28 | length 1846.3
  Top w8: v2(2577.83,3840) J2.68@2577.83,3915.83
  Bottom w8: v2(2577.83,3840) 2577.83,4026.5 2931.33,4380 3280,4380 J4.28@3800,4900
MC1_69: J2.69 J4.29 | length 1741.6
  Top w8: J2.69@2609.33,4158.82 2609.33,4233.82 2815.51,4440 3440,4440 3850,4850 3850,4950 J4.29@3900,5000
MC1_70: J2.70 J4.30 | length 1996.5
  Top w8: v2(2609.33,3800) J2.70@2609.33,3915.83
  Bottom w8: v2(2609.33,3800) 2609.33,4029.33 2930,4350 3350,4350 J4.30@3900,4900
MC1_72: J2.72 J4.32 | length 1985.8
  Top w8: v2(2640.83,3840) J2.72@2640.83,3915.83
  Bottom w8: v2(2640.83,3840) 2640.83,4030.83 2930,4320 3420,4320 J4.32@4000,4900
MC1_74: J2.74 J4.34 | length 2135.2
  Top w8: v2(2672.32,3800) J2.74@2672.32,3915.83
  Bottom w8: v2(2672.32,3800) 2672.32,4032.32 2930,4290 3490,4290 J4.34@4100,4900
MC1_76: J2.76 J4.36 | length 2123.7
  Top w8: v2(2703.82,3840) J2.76@2703.82,3915.83
  Bottom w8: v2(2703.82,3840) 2703.82,4032.26 2931.56,4260 3560,4260 J4.36@4200,4900
MC1_77: J2.77 J4.37 | length 2015.4
  Top w8: J2.77@2735.32,4158.82 2735.32,4233.51 2821.81,4320 3720,4320 4250,4850 4250,4950 J4.37@4300,5000
MC1_79: J2.79 J4.39 | length 2083.9
  Top w8: J2.79@2766.81,4158.82 2766.81,4233.51 2823.3,4290 3790,4290 4350,4850 4350,4950 J4.39@4400,5000
MC2_10: J5.10 J7.10 | length 1540
  Top w8: v1(1664.45,2161.61) J7.10@1664.45,2341.02
  Bottom w8: J5.10@675,1400 730,1455 730,1550 820,1640 1142.83,1640 v1(1664.45,2161.61)
MC2_12: J5.12 J7.12 | length 1484.1
  Top w8: v1(1695.95,2140) J7.12@1695.95,2341.02
  Bottom w8: J5.12@775,1400 830,1455 830,1550 890,1610 1165.95,1610 v1(1695.95,2140)
MC2_15: J5.15 J7.15 | length 1565.2
  Top w8: J5.15@975,1500 975,2004.65 1470.35,2500 1737.44,2500 1758.94,2521.5 J7.15@1758.94,2584.02
MC2_17: J5.17 J7.17 | length 1597.2
  Top w8: J7.17@1790.43,2584.02 v1(1790.43,2680)
  Bottom w8: J5.17@1075,1500 1145,1570 1187.44,1570 1758.94,2141.5 1758.94,2290 1760,2291.06 1760,2456.46 1790.43,2486.89 v1(1790.43,2680)
MC2_19: J5.19 J7.19 | length 1603.5
  Top w8: J7.19@1821.93,2584.02 v1(1821.93,2709.78)
  Bottom w8: J5.19@1175,1500 1790.43,2115.43 1790.43,2435.83 1821.93,2467.32 v1(1821.93,2709.78)
MC2_21: J5.21 J7.21 | length 1515.6
  Top w8: J7.21@1853.43,2584.02 v1(1853.43,2680)
  Bottom w8: J5.21@1275,1500 1277.76,1502.76 1277.76,1542.36 1821.93,2086.54 1821.93,2421.93 1853.43,2453.43 v1(1853.43,2680)
MC2_22: J5.22 J7.22 | length 1180.6
  Top w8: v1(1853.43,2245.85) J7.22@1853.43,2341.02
  Bottom w8: J5.22@1275,1400 1330,1455 1330,1540 1853.43,2063.43 v1(1853.43,2245.85)
MC2_23: J5.23 J7.23 | length 1525
  Top w8: J5.23@1375,1500 1375,2355 1487.91,2467.91 1880.24,2467.91 1884.92,2472.6 J7.23@1884.92,2584.02
MC2_25: J5.25 J7.25 | length 1458.8
  Top w8: J7.25@1916.42,2584.02 v1(1916.42,2680)
  Bottom w8: J5.25@1475,1500 1475,1596.54 1884.92,2006.46 1884.92,2421.12 1916.42,2452.62 v1(1916.42,2680)
MC2_27: J5.27 J7.27 | length 1590.5
  Top w8: J5.27@1575,1500 1440,1635 1440,2370 1510,2440 1920,2440 1947.91,2467.91 J7.27@1947.91,2584.02
MC2_29: J5.29 J7.29 | length 1402.1
  Top w8: J7.29@1979.41,2584.02 v1(1979.41,2680)
  Bottom w8: J5.29@1675,1500 1675,1505.91 1947.91,1778.82 1947.91,2492.4 1979.41,2523.9 v1(1979.41,2680)
MC2_31: J5.31 J7.31 | length 1433.3
  Top w8: J7.31@2010.91,2584.02 v1(2010.91,2709.78)
  Bottom w8: J5.31@1775,1500 1775,1545 1979.41,1749.41 1979.41,2467.32 2010.91,2498.82 v1(2010.91,2709.78)
MC2_33: J5.33 J7.33 | length 1343.7
  Top w8: J7.33@2042.4,2584.02 v1(2042.4,2679.19)
  Bottom w8: J5.33@1875,1500 1875,1570 2010.91,1705.91 2010.91,2460.91 2042.4,2492.4 v1(2042.4,2679.19)
MC2_34: J5.34 J7.34 | length 1013.8
  Top w8: v1(2042.4,2215.16) J7.34@2042.4,2341.02
  Bottom w8: J5.34@1875,1400 1920,1445 1920,1554.61 2046.54,1681.14 2046.54,2022.97 2042.4,2027.11 v1(2042.4,2215.16)
MC2_37: J5.37 J7.37 | length 1148.8
  Top w8: J5.37@2075,1500 2075,1589.61 v2(2168.39,1682.99) ; J7.37@2105.39,2584.02 2105.39,2502.99 v2(2168.39,2440)
  Bottom w8: v2(2168.39,1682.99) v2(2168.39,2440)
MC2_39: J5.39 J7.39 | length 1377.9
  Top w8: J7.39@2136.89,2584.02 v1(2136.89,2710)
  Bottom w8: v1(2136.89,2710) 2136.89,2486.89 2105.39,2455.39 2105.39,1624.61 2175,1555 J5.39@2175,1500
MC2_45: J6.05 J7.45 | length 2421.4
  Top w8: v1(2230,2710) 2230.69,2709.31 2230.69,2584.71 J7.45@2231.38,2584.02
  Bottom w8: v1(2230,2710) 3000,2710 3230,2480 3230,2030 J6.05@2700,1500
MC2_48: J6.08 J7.48 | length 1995.2
  Top w8: v1(2260,2406.08) 2261.44,2404.65 2261.44,2342.46 J7.48@2262.87,2341.02 ; v1(2800,1150) J6.08@2800,1400
  Bottom w8: v1(2260,2406.08) 2290,2376.08 2290,1320 2460,1150 v1(2800,1150)
MC2_59: J6.19 J7.59 | length 2267.6
  Top w8: v1(2450,2800) 2450.93,2799.07 2450.93,2584.94 J7.59@2451.85,2584.02
  Bottom w8: v1(2450,2800) 3060,2800 3400,2460 J6.19@3400,1500
MC2_62: J6.22 J7.62 | length 2551.9
  Top w8: J7.62@2483.35,2341.02 v1(2483.35,2406.08) ; v1(3500,1210) J6.22@3500,1400
  Bottom w8: v1(2483.35,2406.08) 2483.35,1694.49 2370,1581.14 2370,1340 2500,1210 v1(3500,1210)
MC2_71: J6.31 J7.71 | length 2469.4
  Top w8: J7.71@2640.83,2584.02 v1(2640.83,2860)
  Bottom w8: v1(2640.83,2860) 3102.52,2860 4000,1962.52 J6.31@4000,1500
MC2_74: J6.34 J7.74 | length 3037.1
  Top w8: J7.74@2672.32,2341.02 v1(2672.32,2406.08) ; v1(4100,1270) J6.34@4100,1400
  Bottom w8: v1(2672.32,2406.08) 2672.32,1782.32 2430,1540 2430,1380 2540,1270 v1(4100,1270)
MISO_A1: J7.24 U1_A.9 | length 4507.8
  Top w8: J7.24@1884.92,2341.02 1884.92,2185.08 2360,1710 4468.71,1710 4610,1568.71 4610,1054.38 4818.69,845.68 v1(4880,845.68) ; U1_A.9@5179.27,845.68 v1(5280,845.68)
  Bottom w8: v1(4880,845.68) v1(5280,845.68)
MISO_A2: J5.26 J7.26 | length 1123.9
  Top w8: v1(1916.42,2245.85) J7.26@1916.42,2341.02
  Bottom w8: J5.26@1475,1400 1520,1445 1520,1540 1916.42,1936.42 v1(1916.42,2245.85)
MISO_A_N: J1_A.A11 J1_A.B11 U1_A.11 | length 1487.1
  Top w6.3: U1_A.11@4960.73,871.27 4982.63,871.27 4989.78,864.13 5020.19,864.13 5115.79,959.72 5326.69,959.72 5333.31,953.1 5337.99,948.42 5372.41,914 5477.47,914 5487.86,924.39 v1(5489.46,924.39) ; v1@5490,922.39 5493.17,922.39 5501.51,914.04 5528.65,914.04 5548.3,894.39 5605.67,894.39 5609.24,897.95 5631.77,897.95 J1_A.A11@5632.4,898.58
  Bottom w6.3: v1(5489.46,924.39) 5491.17,924.39 v1@5493.17,922.39 ; v1@5489.48,923.09 5494.04,923.09 5501.34,915.79 5528.1,915.79 5549.5,894.39 5549.5,812.26 5493.17,755.92 5493.17,651.52 5524.16,620.53 5726.6,620.53 5748.7,642.63 5748.7,705.88 5728.97,725.61 5722.89,725.61 5712.8,715.51 J1_A.B11@5707.6,715.51
MISO_A_P: J1_A.A10 J1_A.B10 U1_A.12 | length 1520.6
  Top w6.3: U1_A.12@4960.73,845.68 4982.63,845.68 4989.78,852.83 5024.87,852.83 5120.47,948.42 5322.01,948.42 5367.73,902.7 5478.41,902.7 5487.21,893.9 v1(5490.11,893.9) ; v1@5490.2,894.39 5493.17,894.39 5501.51,902.74 5523.96,902.74 5543.62,883.09 5605.67,883.09 5609.24,879.53 5631.77,879.53 J1_A.A10@5632.4,878.9
  Bottom w6.3: v1(5490.11,893.9) 5491.71,893.9 5502.3,904.49 5523.42,904.49 5538.2,889.71 5538.2,816.94 5481.86,760.6 5481.86,646.84 5519.47,609.23 5731.28,609.23 5760,637.95 5760,710.56 5733.65,736.91 5722.89,736.91 5712.8,747.01 J1_A.B10@5707.6,747.01
MISO_B1: J7.38 U1_B.9 | length 3708.1
  Top w8: J7.38@2105.39,2341.02 2105.39,2164.61 2440,1830 4527.8,1830 4812.12,1545.68 v1(4880,1545.68) ; U1_B.9@5179.27,1545.68 v1(5280,1545.68)
  Bottom w8: v1(4880,1545.68) v1(5280,1545.68)
MISO_B2: J5.40 J7.40 | length 1140.8
  Top w8: J7.40@2136.89,2341.02 v1(2136.89,2406.08)
  Bottom w8: v1(2136.89,2406.08) 2136.89,1643.11 2240,1540 2240,1465 J5.40@2175,1400
MISO_B_N: J1_B.A11 J1_B.B11 U1_B.11 | length 1487.1
  Top w6.3: U1_B.11@4960.73,1571.27 4982.63,1571.27 4989.78,1564.13 5020.19,1564.13 5115.79,1659.72 5326.69,1659.72 5333.31,1653.1 5337.99,1648.42 5372.41,1614 5477.47,1614 5487.86,1624.39 v1(5489.46,1624.39) ; v1@5490,1622.39 5493.17,1622.39 5501.51,1614.04 5528.65,1614.04 5548.3,1594.39 5605.67,1594.39 5609.24,1597.95 5631.77,1597.95 J1_B.A11@5632.4,1598.58
  Bottom w6.3: v1(5489.46,1624.39) 5491.17,1624.39 v1@5493.17,1622.39 ; v1@5489.48,1623.09 5494.04,1623.09 5501.34,1615.79 5528.1,1615.79 5549.5,1594.39 5549.5,1512.26 5493.17,1455.92 5493.17,1351.52 5524.16,1320.53 5726.6,1320.53 5748.7,1342.63 5748.7,1405.88 5728.97,1425.61 5722.89,1425.61 5712.8,1415.51 J1_B.B11@5707.6,1415.51
MISO_B_P: J1_B.A10 J1_B.B10 U1_B.12 | length 1520.6
  Top w6.3: U1_B.12@4960.73,1545.68 4982.63,1545.68 4989.78,1552.83 5024.87,1552.83 5120.47,1648.42 5322.01,1648.42 5367.73,1602.7 5478.41,1602.7 5487.21,1593.9 v1(5490.11,1593.9) ; v1@5490.2,1594.39 5493.17,1594.39 5501.51,1602.74 5523.96,1602.74 5543.62,1583.09 5605.67,1583.09 5609.24,1579.53 5631.77,1579.53 J1_B.A10@5632.4,1578.9
  Bottom w6.3: v1(5490.11,1593.9) 5491.71,1593.9 5502.3,1604.49 5523.42,1604.49 5538.2,1589.71 5538.2,1516.94 5481.86,1460.6 5481.86,1346.84 5519.47,1309.23 5731.28,1309.23 5760,1337.95 5760,1410.56 5733.65,1436.91 5722.89,1436.91 5712.8,1447.01 J1_B.B10@5707.6,1447.01
MISO_C1: J7.50 U1_C.9 | length 3439.9
  Top w8: J7.50@2294.37,2341.02 2294.37,2222.99 2567.36,1950 4584.32,1950 v1(4880,2245.68) ; U1_C.9@5179.27,2245.68 v1(5280,2245.68)
  Bottom w8: v1(4880,2245.68) v1(5280,2245.68)
MISO_C2: J6.12 J7.52 | length 2095
  Top w8: J7.52@2325.87,2341.02 v1(2325.87,2406.08) ; v1(3000,1180) J6.12@3000,1400
  Bottom w8: v1(2325.87,2406.08) 2325.87,1334.13 2480,1180 v1(3000,1180)
MISO_C_N: J1_C.A11 J1_C.B11 U1_C.11 | length 1487.1
  Top w6.3: U1_C.11@4960.73,2271.27 4982.63,2271.27 4989.78,2264.13 5020.19,2264.13 5115.79,2359.72 5326.69,2359.72 5333.31,2353.1 5337.99,2348.42 5372.41,2314 5477.47,2314 5487.86,2324.39 v1(5489.46,2324.39) ; v1@5490,2322.39 5493.17,2322.39 5501.51,2314.04 5528.65,2314.04 5548.3,2294.39 5605.67,2294.39 5609.24,2297.95 5631.77,2297.95 J1_C.A11@5632.4,2298.58
  Bottom w6.3: v1(5489.46,2324.39) 5491.17,2324.39 v1@5493.17,2322.39 ; v1@5489.48,2323.09 5494.04,2323.09 5501.34,2315.79 5528.1,2315.79 5549.5,2294.39 5549.5,2212.26 5493.17,2155.92 5493.17,2051.52 5524.16,2020.53 5726.6,2020.53 5748.7,2042.63 5748.7,2105.88 5728.97,2125.61 5722.89,2125.61 5712.8,2115.51 J1_C.B11@5707.6,2115.51
MISO_C_P: J1_C.A10 J1_C.B10 U1_C.12 | length 1520.6
  Top w6.3: U1_C.12@4960.73,2245.68 4982.63,2245.68 4989.78,2252.83 5024.87,2252.83 5120.47,2348.42 5322.01,2348.42 5367.73,2302.7 5478.41,2302.7 5487.21,2293.9 v1(5490.11,2293.9) ; v1@5490.2,2294.39 5493.17,2294.39 5501.51,2302.74 5523.96,2302.74 5543.62,2283.09 5605.67,2283.09 5609.24,2279.53 5631.77,2279.53 J1_C.A10@5632.4,2278.9
  Bottom w6.3: v1(5490.11,2293.9) 5491.71,2293.9 5502.3,2304.49 5523.42,2304.49 5538.2,2289.71 5538.2,2216.94 5481.86,2160.6 5481.86,2046.84 5519.47,2009.23 5731.28,2009.23 5760,2037.95 5760,2110.56 5733.65,2136.91 5722.89,2136.91 5712.8,2147.01 J1_C.B10@5707.6,2147.01
MISO_D1: J7.64 U1_D.9 | length 3414.6
  Top w8: J7.64@2514.84,2341.02 2514.84,2215.16 2660,2070 4004.32,2070 v1(4880,2945.68) ; U1_D.9@5179.27,2945.68 v1(5280,2945.68)
  Bottom w8: v1(4880,2945.68) v1(5280,2945.68)
MISO_D2: J6.26 J7.66 | length 2681.5
  Top w8: J7.66@2546.34,2341.02 v1(2546.34,2406.08) ; v1(3700,1240) J6.26@3700,1400
  Bottom w8: v1(2546.34,2406.08) 2546.34,1706.34 2400,1560 2400,1360 2520,1240 v1(3700,1240)
MISO_D_N: J1_D.A11 J1_D.B11 U1_D.11 | length 1487.1
  Top w6.3: U1_D.11@4960.73,2971.27 4982.63,2971.27 4989.78,2964.13 5020.19,2964.13 5115.79,3059.72 5326.69,3059.72 5333.31,3053.1 5337.99,3048.42 5372.41,3014 5477.47,3014 5487.86,3024.39 v1(5489.46,3024.39) ; v1@5490,3022.39 5493.17,3022.39 5501.51,3014.04 5528.65,3014.04 5548.3,2994.39 5605.67,2994.39 5609.24,2997.95 5631.77,2997.95 J1_D.A11@5632.4,2998.58
  Bottom w6.3: v1(5489.46,3024.39) 5491.17,3024.39 v1@5493.17,3022.39 ; v1@5489.48,3023.09 5494.04,3023.09 5501.34,3015.79 5528.1,3015.79 5549.5,2994.39 5549.5,2912.26 5493.17,2855.92 5493.17,2751.52 5524.16,2720.53 5726.6,2720.53 5748.7,2742.63 5748.7,2805.88 5728.97,2825.61 5722.89,2825.61 5712.8,2815.51 J1_D.B11@5707.6,2815.51
MISO_D_P: J1_D.A10 J1_D.B10 U1_D.12 | length 1520.6
  Top w6.3: U1_D.12@4960.73,2945.68 4982.63,2945.68 4989.78,2952.83 5024.87,2952.83 5120.47,3048.42 5322.01,3048.42 5367.73,3002.7 5478.41,3002.7 5487.21,2993.9 v1(5490.11,2993.9) ; v1@5490.2,2994.39 5493.17,2994.39 5501.51,3002.74 5523.96,3002.74 5543.62,2983.09 5605.67,2983.09 5609.24,2979.53 5631.77,2979.53 J1_D.A10@5632.4,2978.9
  Bottom w6.3: v1(5490.11,2993.9) 5491.71,2993.9 5502.3,3004.49 5523.42,3004.49 5538.2,2989.71 5538.2,2916.94 5481.86,2860.6 5481.86,2746.84 5519.47,2709.23 5731.28,2709.23 5760,2737.95 5760,2810.56 5733.65,2836.91 5722.89,2836.91 5712.8,2847.01 J1_D.B10@5707.6,2847.01
MISO_E1: J7.76 U1_E.9 | length 3403.8
  Top w8: J7.76@2703.82,2341.02 2703.82,2236.18 2750,2190 3424.32,2190 v1(4880,3645.68) ; U1_E.9@5179.27,3645.68 v1(5280,3645.68)
  Bottom w8: v1(4880,3645.68) v1(5280,3645.68)
MISO_E2: J6.39 J7.79 | length 2579.4
  Top w8: J7.79@2766.81,2584.02 v1(2766.81,2890)
  Bottom w8: v1(2766.81,2890) 3120,2890 4400,1610 J6.39@4400,1500
MISO_E_N: J1_E.A11 J1_E.B11 U1_E.11 | length 1487.1
  Top w6.3: U1_E.11@4960.73,3671.27 4982.63,3671.27 4989.78,3664.13 5020.19,3664.13 5115.79,3759.72 5326.69,3759.72 5333.31,3753.1 5337.99,3748.42 5372.41,3714 5477.47,3714 5487.86,3724.39 v1(5489.46,3724.39) ; v1@5490,3722.39 5493.17,3722.39 5501.51,3714.04 5528.65,3714.04 5548.3,3694.39 5605.67,3694.39 5609.24,3697.95 5631.77,3697.95 J1_E.A11@5632.4,3698.58
  Bottom w6.3: v1(5489.46,3724.39) 5491.17,3724.39 v1@5493.17,3722.39 ; v1@5489.48,3723.09 5494.04,3723.09 5501.34,3715.79 5528.1,3715.79 5549.5,3694.39 5549.5,3612.26 5493.17,3555.92 5493.17,3451.52 5524.16,3420.53 5726.6,3420.53 5748.7,3442.63 5748.7,3505.88 5728.97,3525.61 5722.89,3525.61 5712.8,3515.51 J1_E.B11@5707.6,3515.51
MISO_E_P: J1_E.A10 J1_E.B10 U1_E.12 | length 1520.6
  Top w6.3: U1_E.12@4960.73,3645.68 4982.63,3645.68 4989.78,3652.83 5024.87,3652.83 5120.47,3748.42 5322.01,3748.42 5367.73,3702.7 5478.41,3702.7 5487.21,3693.9 v1(5490.11,3693.9) ; v1@5490.2,3694.39 5493.17,3694.39 5501.51,3702.74 5523.96,3702.74 5543.62,3683.09 5605.67,3683.09 5609.24,3679.53 5631.77,3679.53 J1_E.A10@5632.4,3678.9
  Bottom w6.3: v1(5490.11,3693.9) 5491.71,3693.9 5502.3,3704.49 5523.42,3704.49 5538.2,3689.71 5538.2,3616.94 5481.86,3560.6 5481.86,3446.84 5519.47,3409.23 5731.28,3409.23 5760,3437.95 5760,3510.56 5733.65,3536.91 5722.89,3536.91 5712.8,3547.01 J1_E.B10@5707.6,3547.01
MISO_F1: J7.69 U1_F.9 | length 3816.7
  Top w8: J7.69@2609.33,2584.02 2613.45,2588.14 2613.45,3076.8 2896.65,3360 3944.39,3360 4880,4295.61 v1(4880,4345.68) ; U1_F.9@5179.27,4345.68 v1(5280,4345.68)
  Bottom w8: v1(4880,4345.68) v1(5280,4345.68)
MISO_F2: J6.27 J7.67 | length 2376.6
  Top w8: J7.67@2577.83,2584.02 2578.92,2585.1 2578.92,2828.92 v1(2580,2830)
  Bottom w8: v1(2580,2830) 3082.52,2830 3800,2112.52 J6.27@3800,1500
MISO_F_N: J1_F.A11 J1_F.B11 U1_F.11 | length 1487.1
  Top w6.3: U1_F.11@4960.73,4371.27 4982.63,4371.27 4989.78,4364.13 5020.19,4364.13 5115.79,4459.72 5326.69,4459.72 5333.31,4453.1 5337.99,4448.42 5372.41,4414 5477.47,4414 5487.86,4424.39 v1(5489.46,4424.39) ; v1@5490,4422.39 5493.17,4422.39 5501.51,4414.04 5528.65,4414.04 5548.3,4394.39 5605.67,4394.39 5609.24,4397.95 5631.77,4397.95 J1_F.A11@5632.4,4398.58
  Bottom w6.3: v1(5489.46,4424.39) 5491.17,4424.39 v1@5493.17,4422.39 ; v1@5489.48,4423.09 5494.04,4423.09 5501.34,4415.79 5528.1,4415.79 5549.5,4394.39 5549.5,4312.26 5493.17,4255.92 5493.17,4151.52 5524.16,4120.53 5726.6,4120.53 5748.7,4142.63 5748.7,4205.88 5728.97,4225.61 5722.89,4225.61 5712.8,4215.51 J1_F.B11@5707.6,4215.51